# Altium PCB PCB.PcbDoc
Units mm, origin at the board's own origin, x right, y up, seen from the top; angles counter-clockwise.
Board outline 22 x 22 mm, 2 copper layers (Top Layer, Bottom Layer); 10 components, 6 nets, 24 pads, 59 vias.
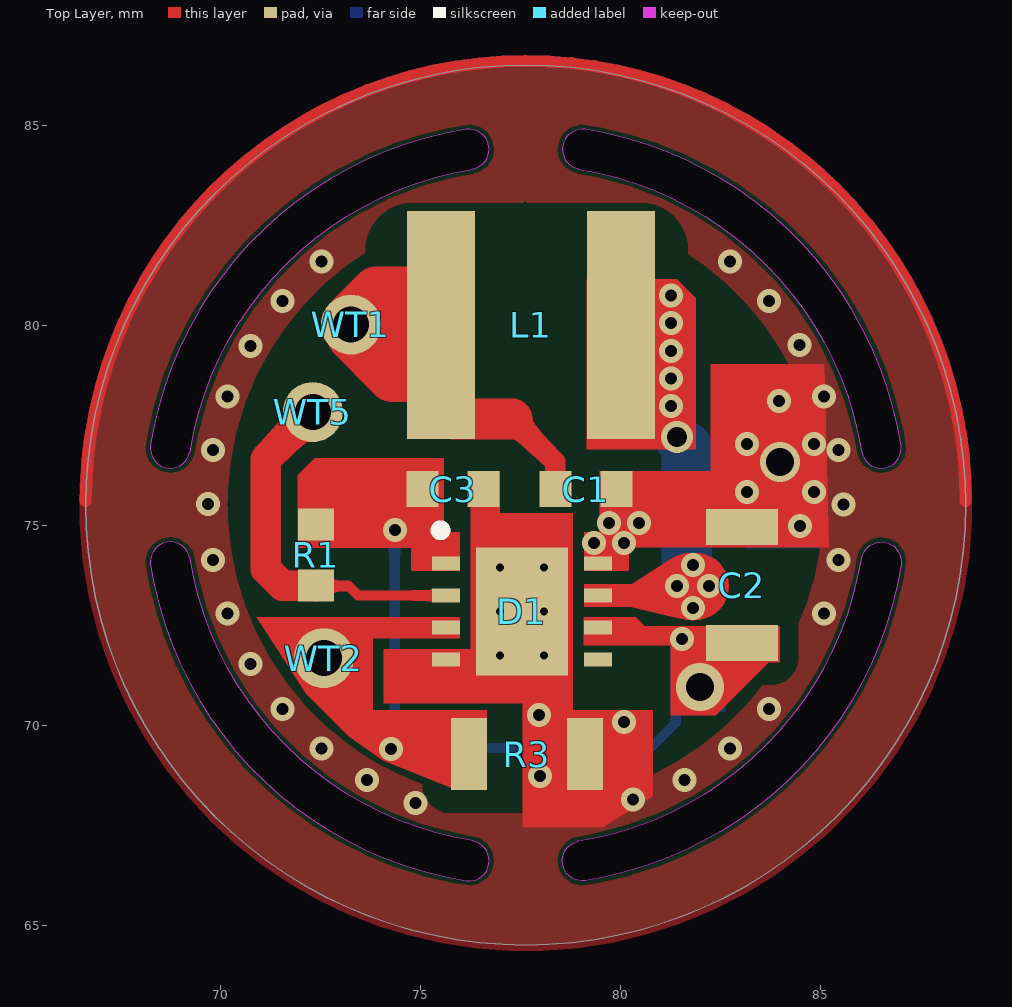
[diagram p0: Top Layer view]
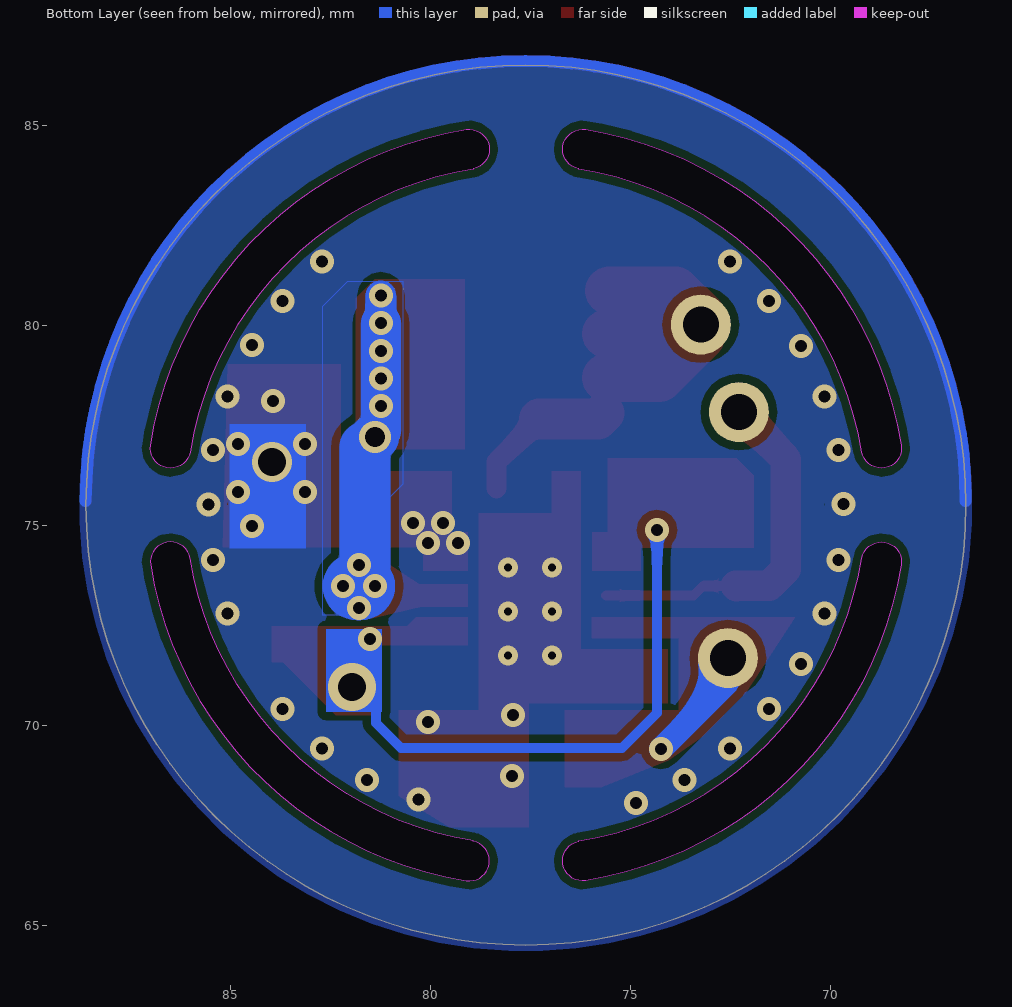
[diagram p1: Bottom Layer view, seen from below]
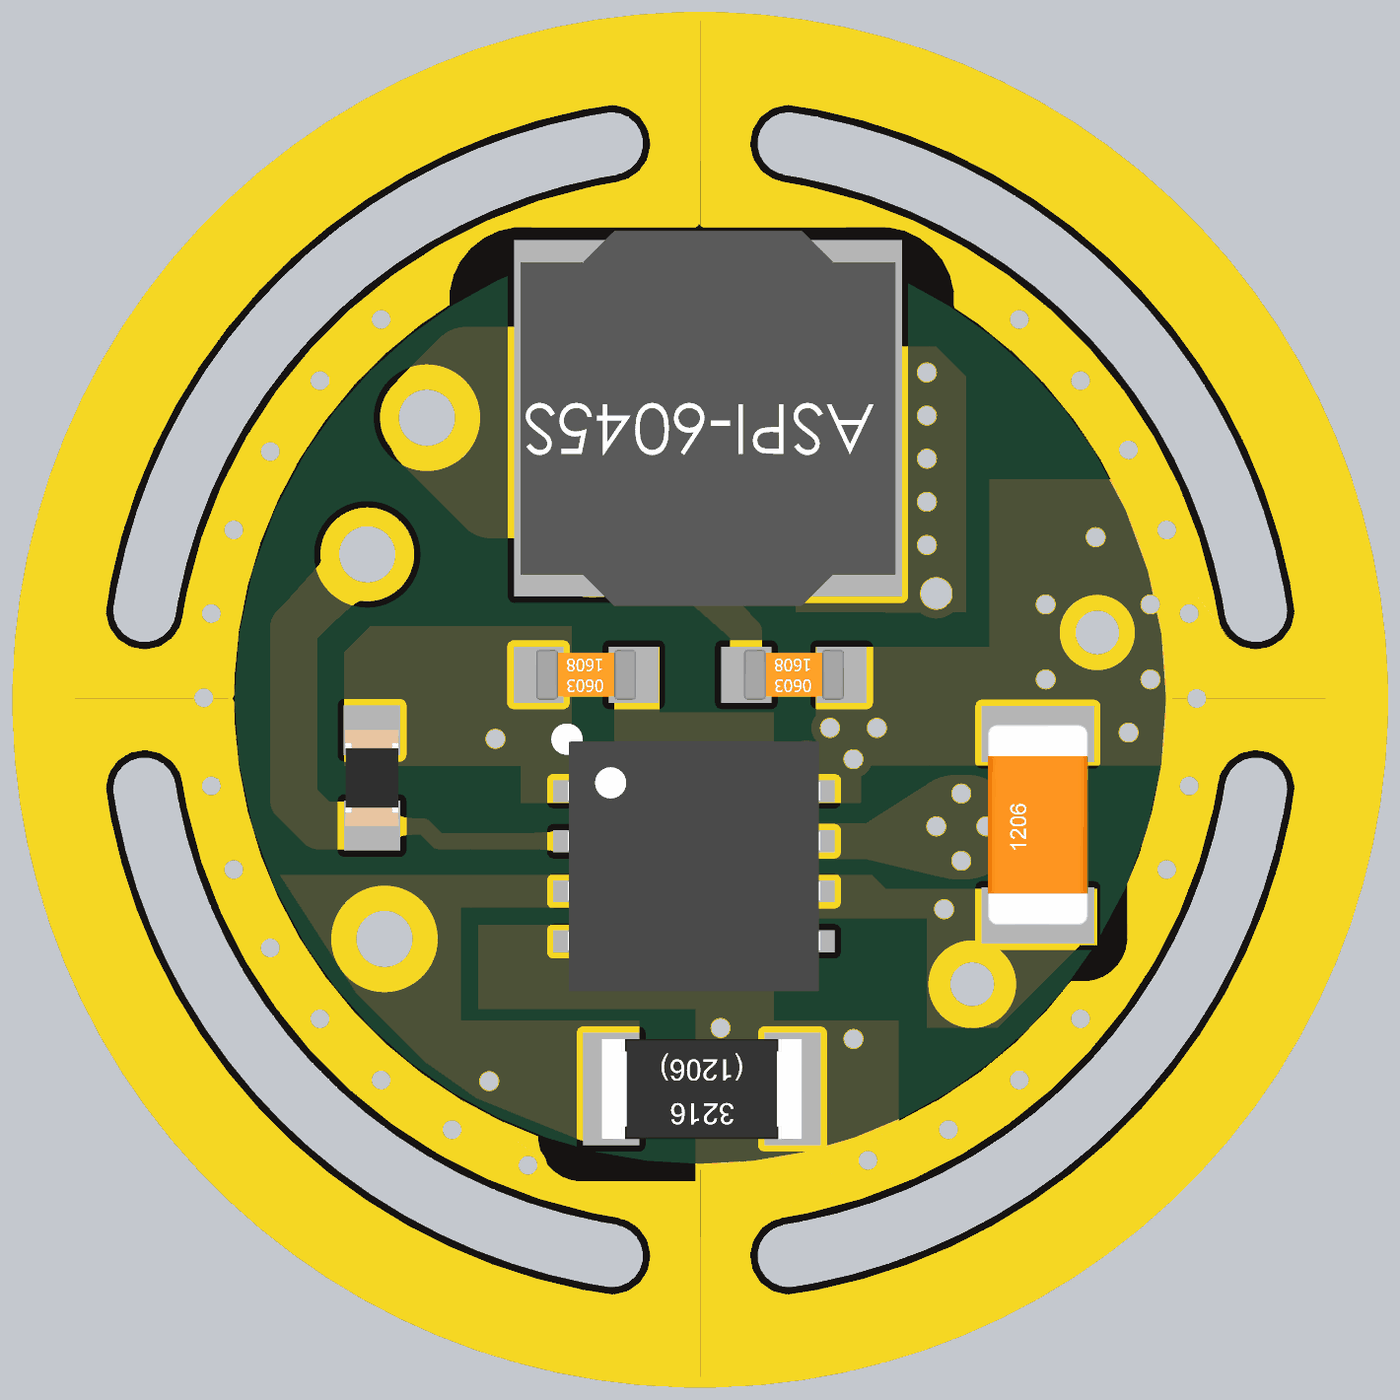
[diagram p2: 3D render of the assembled board from above, using the file's embedded part models]

## Layer stack, top to bottom
Top Solder: solder mask 0.0102, Solder Resist, Dk 3.5
Top Layer: signal copper 0.0356
Dielectric 1: dielectric 0.32, FR-4, Dk 4.8
Bottom Layer: signal copper 0.0356
Bottom Solder: solder mask 0.0102, Solder Resist, Dk 3.5

## Board outline
66.625,75.5 ccw(c77.625,75.5) 77.625,64.5 ccw(c77.625,75.5) 88.625,75.5 ccw(c77.625,75.5) 77.625,86.5 ccw(c77.625,75.5)
cut-out: 68.243,76.997 ccw(c68.737,76.923) 69.227,76.825 69.232,76.824 cw(c77.628,75.497) 76.308,83.894 76.307,83.905 ccw(c76.209,84.395) 76.135,84.889 ccw(c77.625,75.507)
cut-out: 78.942,83.894 cw(c77.623,75.497) 86.018,76.824 86.023,76.825 ccw(c86.513,76.923) 87.007,76.997 ccw(c77.625,75.507) 79.115,84.889 ccw(c79.041,84.395)
cut-out: 68.243,74.003 ccw(c77.625,75.493) 76.135,66.111 ccw(c76.209,66.605) 76.307,67.095 76.308,67.106 cw(c77.628,75.503) 69.232,74.176 69.227,74.175 ccw(c68.737,74.077)
cut-out: 79.115,66.111 cw(c79.041,66.605) 78.943,67.095 78.942,67.106 ccw(c77.623,75.503) 86.018,74.176 86.023,74.175 cw(c86.513,74.077) 87.007,74.003 cw(c77.625,75.493)

## Design rules (kind name [scope] priority, off if disabled: settings)
Clearance [InNamedPolygon('BotLayer-GND')] p1: gap=0.2
Clearance Clearance_2 [InNamedPolygon('TopLayer-GND')] p2: gap=0.1
Clearance Clearance_1 [All] p3: gap=0.01
ComponentClearance [All] p1: gap=-20 collisioncheckmode=3 verticalgap=-20 showdistances=FALSE
PolygonConnect [All] p1: connectstyle=Direct reliefconductorwidth=0.254 reliefentries=4 polygonreliefangle="90 Angle" airgapwidth=0.254
RoutingVias [All] p1: holewidth=0.711 width=1.27 viastyle="Through Hole" minholewidth=0.1 minwidth=0.1 maxholewidth=0.711 maxwidth=1.27
SolderMaskExpansion [All] p1: expansion=0.102
Width [All] p1: maxlimit=1.27 minlimit=0.01 preferedwidth=0.254
29 further rules are at their usual default settings.

## Components (designator, comment, footprint, x,y, rotation, side; value= is the part's Value field where it differs from the comment)
C1 "2u2" "Cap 0603" 79.125,75.9 r180 top
C2 "22u" "Cap 1206" 83.025,73.5 r90 top
C3 "1u0" "Cap 0603" 75.8,75.9 r180 top
D1 "LED2001" "VQFPN-8 4x4" 77.525,72.838 r270 top
L1 "51" ASPI-6045S-5R1N-T 77.75,80 r180 top
R1 "103" "R0603 5%" 72.375,74.25 r90 top
R3 "X" "Resistor 1206" 77.65,69.275 r180 top
WT1 "*" WT 73.254,80.01 r135 top
WT2 "*" WT 72.575,71.675 r90 top
WT5 "*" WT 72.3,77.825 r90 top

## Footprints (in the part's own frame and the unit in brackets; to place one, negate y for a bottom-side part, rotate by r counter-clockwise, add the part's x,y. Pads: shape width x height; smd on the part's side, far side on the other; paste and mask are expansions set on the pad)
ASPI-6045S-5R1N-T [mm]
  rect 1.7x5.7 smd: 1(-2.25,0) 2(2.25,0)
  body extent -3,-3 3,3, height 4.5
"Cap 0603" [mm]
  rect 0.8x0.9 smd: 1(-0.762,0) 2(0.762,0)
  body extent -0.8,-0.4 0.8,0.4, height 0.8
"Cap 1206" [mm]
  rect 0.9x1.8 smd: 1(-1.45,0) 2(1.45,0)
  body extent -1.6,-0.8 1.6,0.8, height 1
"R0603 5%" [mm]
  rect 0.8x0.9 smd: 1(-0.762,0) 2(0.762,0)
  body extent -0.77,-0.43 0.78,0.43, height 0.43
"Resistor 1206" [mm]
  rect 0.9x1.8 smd: 1(-1.45,0) 2(1.45,0)
  body extent -1.6,-0.8 1.6,0.8, height 0.55
"VQFPN-8 4x4" [mm]
  rect 0.35x0.7 smd: 1(-1.2,-1.9) 2(-0.4,-1.9) 3(0.4,-1.9) 4(1.2,-1.9) 5(1.2,1.9) 6(0.4,1.9) 7(-0.4,1.9) 8(-1.2,1.9)
  rect 3.2x2.3 smd: 9(0,0)
  silkscreen extent -2.16,-2.16 -1.91,-1.91, body extent -2,-2.02 2,2.02, height 0.9
WT [mm]
  round 1.5 hole 0.9: 1(0,0)

## Part data
C1: library part CMP-00038-2, "C 2.2uF  x 25V"
C2: library part CMP-00564-1, "C 22uF x 25V"
C3: library part CMP-00074-2, "C 1uF  x 25V"
D1: library part CMP-00546-6
L1: library part CMP-00554-1, "ASPI-6045S-5R1N-T, 5.1uH x 3.3A"
R1: library part CMP-00052-2, "R 10K"
R3: library part CMP-00516-2, "R X"
WT1 WT2 WT5: library part CMP-00159-1, "WT"

## Via types
v1: diameter 0.6, hole 0.3, Top Layer to Bottom Layer, tented both sides, 49 vias
v2: diameter 0.5, hole 0.2, Top Layer to Bottom Layer, 6 vias
v3: diameter 0.8/0.8 (per signal layer), hole 0.5, Top Layer to Bottom Layer, 1 vias
v4: diameter 1.2/1.2 (per signal layer), hole 0.7, Top Layer to Bottom Layer, 1 vias
v5: diameter 0.6/0.6 (per signal layer), hole 0.3, Top Layer to Bottom Layer, tented both sides, 1 vias
v6: diameter 1, hole 0.7, Top Layer to Bottom Layer, 1 vias

## Nets (pads, with @x,y where several pads share a name; then routed paths per layer and width w, separated by ;. In a path a pad name is that pad's centre, name@x,y a point inside that pad or via, vN(x,y) a via of type N, cw(c..) or ccw(c..) an arc to the next point about the centre after c; other vN are vias at no path point)
22V: C2.1 C3.2 D1.1 D1.6 R1.2 | length 12.8
  Bottom Layer w0.254: v1(74.35,74.875) 74.35,70.3 75.225,69.425 80.75,69.425 81.375,70.05 81.375,70.6 ; v5(81.525,72.15) v5@81.525,72.175
  other v4: 81.975,70.95
DIM: D1.2 R1.1 WT5.1 | length 9.2
  Top Layer w0.254: R1.1@72.374,73.475 73.2,73.475 73.437,73.238 D1.2
  Top Layer w0.762: WT5.1 71.125,76.65 71.125,73.9 71.537,73.488 R1.1 ; R1.1@72.362,73.475 R1.1
LED1: C1.2 L1.2 WT1.1 | length 11.7
  Top Layer w0.508: 77.29,77.65 78.359,76.581 C1.2@78.359,75.921
  Top Layer w1.016: L1.2@75.675,77.8 75.825,77.65 77.29,77.65
  Top Layer w1.208: WT1.1@73.629,79.785 L1.2@75.62,79.785 ; L1.2@75.545,80.86 73.885,80.86 73.254,80.229 WT1.1 73.254,79.721 74.29,78.685 L1.2@75.625,78.685
NetD1_3: D1.3 R3.2 WT2.1 | length 3
  Bottom Layer w0.584: WT2.1 72.575,71.075 v1(74.25,69.4)
NetD1_7: D1.7 L1.1 | length 12.8
  Top Layer w0.33: D1.7 81.163,73.238 v1(81.4,73.475)
  Top Layer w0.508: L1.1@79.999,79.756 79.999,77.526 80.375,77.15 81.35,77.15 v3(81.4,77.2)
  Bottom Layer w0.762: v3@81.25,77.35 v3(81.4,77.2) ; v1(81.25,80.045) v1(81.25,80.735)
  Bottom Layer w1: v3@81.25,77.35 v1(81.25,77.975) v1(81.25,78.665) v1(81.25,79.355) v1(81.25,80.045)
  Bottom Layer w1.2: v3(81.4,77.2) v3@81.65,76.95
  Bottom Layer w1.27: v1@81.65,74 v3@81.65,76.95
  other v1: 81.8,72.925 82.2,73.475 81.8,74
P_GND: C1.1 C2.2 C3.1 D1.4 D1.8 D1.9 R3.1 | length 69.1
  Top Layer w0.3: 66.624,75.604 cw(c77.624,75.604) 77.038,86.588 cw(c77.624,75.604) 88.624,75.604
  Bottom Layer w0.3: 66.63,75.604 cw(c77.63,75.604) 88.63,75.604
  other v1: 74.87,68.055 80.306,68.133 73.655,68.624 81.595,68.624 77.975,68.725 72.521,69.418 82.729,69.418 80.075,70.075 77.95,70.25 71.543,70.396 83.707,70.396 70.749,71.53 70.164,72.784 85.086,72.784 69.806,74.121 85.444,74.121 79.325,74.55 80.075,74.55 84.475,74.975 79.7,75.05 80.45,75.05 85.565,75.519 69.685,75.531 83.15,75.825 84.825,75.825 69.806,76.879 85.444,76.879 83.15,77.025 84.825,77.025 83.95,78.1 70.164,78.216 85.086,78.216 70.749,79.47 84.474,79.497 71.543,80.604 83.707,80.604 72.521,81.582 82.729,81.582
  other v2: 76.975,71.738 78.075,71.738 76.975,72.838 78.075,72.838 76.975,73.938 78.075,73.938
  other v6: 83.975,76.575
pads on no net: D1.5

## Polygon pours and split planes (outlines as drawn)
P_GND on Bottom Layer "BotLayer-GND" (solid, remove dead copper, pour order 79): 77.557,86.396 77.557,83.089 ccw(c77.625,75.539) 70.075,75.53 ccw(c70.125,75.53) 70.175,75.53 ccw(c70.125,75.53) 70.175,75.53 cw(c77.625,75.539) 77.588,82.988 ccw(c77.621,83.043) 77.654,82.988 cw(c77.625,75.539) 85.075,75.539 ccw(c85.125,75.539) 85.075,75.533 ccw(c85.125,75.528) 85.075,75.528 cw(c77.625,75.539) 85.075,75.526 ccw(c85.125,75.526) 85.125,75.476 ccw(c85.125,75.526) 85.125,75.476 86.256,75.478 86.9,75.479 88.488,75.481 ccw(c88.63,75.532) 88.78,75.532 ccw(c77.63,75.532) 77.621,86.682 ccw(c77.621,86.532)
P_GND on Bottom Layer "BotLayer-GND" (solid, remove dead copper, pour order 77): 70.175,75.53 cw(c70.125,75.53) 70.175,75.526 cw(c70.125,75.521) 70.175,75.521 ccw(c77.634,75.545) 70.175,75.52 ccw(c77.608,75.519) 70.175,75.519 ccw(c70.125,75.519) 70.175,75.52 70.175,75.519 cw(c70.125,75.519) 70.125,75.468 cw(c70.125,75.519) 70.125,75.468 ccw(c70.125,75.519) 70.125,75.468 68.994,75.47 68.35,75.471 66.772,75.474 cw(c66.63,75.525) 66.48,75.525 cw(c77.63,75.532) 68.943,82.522 cw(c77.63,75.532) 77.621,86.682 cw(c77.621,86.532) 77.771,86.532 cw(c77.621,86.532) 77.685,86.396 77.685,83.089 cw(c77.625,75.539) 85.175,75.539 cw(c85.125,75.539) 85.075,75.539 ccw(c77.625,75.539) 77.654,82.988 cw(c77.621,83.043) 77.588,82.988 ccw(c77.625,75.539)
P_GND on Bottom Layer "BotLayer-GND" (solid, remove dead copper, pour order 31): 70.175,75.509 ccw(c70.125,75.509) 70.175,75.513 ccw(c70.125,75.518) 70.175,75.518 cw(c77.634,75.494) 70.175,75.519 cw(c77.608,75.52) 70.175,75.52 cw(c70.125,75.52) 70.175,75.519 70.175,75.52 ccw(c70.125,75.52) 70.125,75.57 ccw(c70.125,75.52) 70.125,75.57 cw(c70.125,75.52) 70.125,75.57 68.994,75.569 68.35,75.567 66.772,75.565 ccw(c66.63,75.514) 66.48,75.514 ccw(c77.63,75.507) 68.943,68.517 ccw(c77.63,75.507) 77.621,64.357 ccw(c77.621,64.507) 77.771,64.507 ccw(c77.621,64.507) 77.685,64.643 77.685,67.95 ccw(c77.625,75.5) 85.175,75.5 ccw(c85.125,75.5) 85.075,75.5 cw(c77.625,75.5) 77.654,68.05 ccw(c77.621,67.996) 77.588,68.05 cw(c77.625,75.5)
P_GND on Bottom Layer "BotLayer-GND" (solid, remove dead copper, pour order 29): 77.557,64.643 77.557,67.95 cw(c77.625,75.5) 70.075,75.509 cw(c70.125,75.509) 70.175,75.509 cw(c70.125,75.509) 70.175,75.509 ccw(c77.625,75.5) 77.588,68.05 cw(c77.621,67.996) 77.654,68.05 ccw(c77.625,75.5) 85.075,75.5 cw(c85.125,75.5) 85.075,75.506 cw(c85.125,75.511) 85.075,75.511 ccw(c77.625,75.5) 85.075,75.513 cw(c85.125,75.513) 85.125,75.563 cw(c85.125,75.513) 85.125,75.563 86.256,75.561 86.9,75.56 88.488,75.558 cw(c88.63,75.507) 88.78,75.507 cw(c77.63,75.507) 77.621,64.357 cw(c77.621,64.507)
P_GND on Bottom Layer "BotLayer-GND" (solid, remove dead copper, pour order 81): 70.176,68.061 85.076,68.061 85.071,82.988 70.176,82.988
NetD1_7 on Bottom Layer "NetD1_7x" (solid, pour order 83): 81.7,72.725 81.725,72.75 82.7,72.75 82.7,80.475 82.175,81 82.075,81.1 80.7,81.1 80.7,76.025 81.025,75.7 81.025,73.275 81.175,73.125
NetD1_7 on Bottom Layer "Bottom Layer-NetD1_7" (solid, pour order 85): 81.7,72.725 81.725,72.75 82.7,72.75 82.7,80.475 82.175,81 82.075,81.1 80.7,81.1 80.7,76.025 81.025,75.7 81.025,73.275 81.175,73.125
P_GND on Top Layer "TopLayer-GND" (solid, remove dead copper, pour order 65): 70.17,75.508 ccw(c70.119,75.508) 70.169,75.513 ccw(c70.119,75.518) 70.17,75.518 cw(c77.628,75.493) 70.17,75.519 cw(c77.602,75.519) 70.17,75.52 cw(c70.119,75.52) 70.17,75.519 70.17,75.52 ccw(c70.119,75.52) 70.119,75.57 ccw(c70.119,75.52) 70.119,75.57 cw(c70.119,75.52) 70.119,75.57 68.988,75.568 68.344,75.567 66.766,75.565 ccw(c66.624,75.514) 66.474,75.514 ccw(c77.624,75.507) 68.937,68.517 ccw(c77.624,75.507) 77.615,64.356 ccw(c77.615,64.507) 77.765,64.507 ccw(c77.615,64.507) 77.679,64.643 77.679,67.95 ccw(c77.619,75.5) 85.17,75.5 ccw(c85.119,75.5) 85.069,75.5 cw(c77.619,75.5) 77.648,68.05 ccw(c77.615,67.996) 77.582,68.05 cw(c77.619,75.5)
P_GND on Top Layer "TopLayer-GND" (solid, remove dead copper, pour order 67): 77.551,64.643 77.551,67.95 cw(c77.619,75.5) 70.069,75.508 cw(c70.119,75.508) 70.17,75.508 cw(c70.119,75.508) 70.17,75.508 ccw(c77.619,75.5) 77.582,68.05 cw(c77.615,67.996) 77.648,68.05 ccw(c77.619,75.5) 85.069,75.5 cw(c85.119,75.5) 85.069,75.505 cw(c85.119,75.511) 85.069,75.511 ccw(c77.619,75.5) 85.069,75.512 cw(c85.119,75.513) 85.119,75.563 cw(c85.119,75.513) 85.119,75.563 86.251,75.561 86.894,75.56 88.483,75.557 cw(c88.624,75.507) 88.775,75.507 cw(c77.624,75.507) 77.615,64.356 cw(c77.615,64.507)
P_GND on Top Layer "TopLayer-GND" (solid, remove dead copper, pour order 73): 77.551,86.396 77.551,83.089 ccw(c77.619,75.539) 70.069,75.53 ccw(c70.119,75.53) 70.17,75.531 ccw(c70.119,75.531) 70.17,75.531 cw(c77.619,75.539) 77.582,82.989 ccw(c77.615,83.043) 77.648,82.989 cw(c77.619,75.539) 85.069,75.539 ccw(c85.119,75.539) 85.069,75.534 ccw(c85.119,75.528) 85.069,75.528 cw(c77.619,75.539) 85.069,75.526 ccw(c85.119,75.526) 85.119,75.476 ccw(c85.119,75.526) 85.119,75.476 86.251,75.478 86.894,75.479 88.483,75.482 ccw(c88.624,75.532) 88.775,75.532 ccw(c77.624,75.532) 77.615,86.683 ccw(c77.615,86.532)
P_GND on Top Layer "TopLayer-GND" (solid, remove dead copper, pour order 75): 70.17,75.531 cw(c70.119,75.531) 70.169,75.526 cw(c70.119,75.521) 70.17,75.521 ccw(c77.628,75.545) 70.17,75.52 ccw(c77.602,75.52) 70.17,75.519 ccw(c70.119,75.519) 70.17,75.52 70.17,75.519 cw(c70.119,75.519) 70.119,75.469 cw(c70.119,75.519) 70.119,75.469 ccw(c70.119,75.519) 70.119,75.469 68.988,75.471 68.344,75.472 66.766,75.474 cw(c66.624,75.525) 66.474,75.525 cw(c77.624,75.532) 68.937,82.522 cw(c77.624,75.532) 77.615,86.683 cw(c77.615,86.532) 77.765,86.532 cw(c77.615,86.532) 77.679,86.396 77.679,83.089 cw(c77.619,75.539) 85.17,75.539 cw(c85.119,75.539) 85.069,75.539 ccw(c77.619,75.539) 77.648,82.989 cw(c77.615,83.043) 77.582,82.989 ccw(c77.619,75.539)

## Other copper
Top Layer:
  rectangle net NetD1_7: 79.075,72.95 80.275,73.525
  rectangle net 22V: 74.75,73.85 75.975,74.825
  rectangle net P_GND: 79.075,73.85 80.2,74.825
  region net NetD1_7: 80.275,72.95 81.502,72.658 81.199,74.116 80.275,73.525
  region net P_GND: 76.25,71.9 74.075,71.9 74.075,70.55 77.55,70.55 77.55,67.45 79.545,67.45 80.8,68.218 80.8,70.375 78.8,70.375 78.8,71.5 78.8,75.3 76.975,75.3 76.975,76.35 76.25,76.35
  region net NetD1_3: 75.975,72.7 70.898,72.7 72.137,70.787 73.198,69.726 74.05,69.125 75.725,68.45 76.65,68.45 76.65,70.375 73.8,70.375 73.8,72.175 75.975,72.175
  region net 22V: 75.575,76.675 75.575,74.438 71.925,74.438 71.925,76.25 72.35,76.675 73.875,76.675
  region net NetD1_7: 79.15,76.9 81.875,76.9 81.875,80.675 81.4,81.15 79.15,81.15
  region net P_GND: 79.475,74.45 79.475,76.35 82.25,76.35 82.25,79.025 85.081,79.025 85.2,74.45
  region net 22V: 79.075,72.7 79.075,72 81.25,72 81.25,70.25 82.375,70.25 83.7,71.575 83.975,71.575 83.975,72.475 80.6,72.475 80.375,72.7
  region net NetD1_7: 80.9,73.475 cw(c81.725,73.475) 81.725,74.3 81.875,74.3 cw(c81.875,73.475) 82.7,73.475 cw(c81.85,73.475) 81.85,72.625 81.75,72.625 cw(c81.75,73.475)
  pour cut-out: 77.688,67.799 75.737,67.799 cw(c75.737,68.499) 75.037,68.499 75.037,69.657
  pour cut-out: 84.454,72.759 84.454,71.7 cw(c83.754,71.7) 83.754,71 83.221,71
  pour cut-out: 76.841,83.056 80.509,83.057 cw(c80.509,81.882) 81.659,81.643
  pour cut-out: 78.457,83.056 74.789,83.057 ccw(c74.789,81.882) 73.639,81.643
Bottom Layer:
  rectangle net 22V: 81.225,70.325 82.625,72.4
  region net P_GND: 83.125,77.525 83.125,74.425 84.163,74.425 85.025,74.425 85.025,77.525 84.8,77.525
  region net NetD1_7: 82.7,73.475 ccw(c81.875,73.475) 81.875,74.3 81.725,74.3 ccw(c81.725,73.475) 80.9,73.475 ccw(c81.75,73.475) 81.75,72.625 81.85,72.625 ccw(c81.85,73.475)

## Silkscreen, mask and mechanical layers (free items; w line width, h text height)
Top Solder:
  region: 88.62,75.514 ccw(c77.62,75.507) 77.625,86.507 77.631,83 cw(c77.625,75.5) 83.98,79.483 cw(c77.625,75.5) 85.125,75.52
  region: 88.62,75.514 cw(c77.62,75.522) 77.625,64.522 77.631,68.029 ccw(c77.625,75.529) 83.98,71.545 ccw(c77.625,75.529) 85.125,75.509
  region: 66.63,75.514 ccw(c77.63,75.522) 77.625,64.522 77.619,68.029 cw(c77.625,75.529) 71.27,71.545 cw(c77.625,75.529) 70.125,75.509
  region: 66.63,75.514 cw(c77.63,75.507) 77.625,86.507 77.619,83 ccw(c77.625,75.5) 71.27,79.483 ccw(c77.625,75.5) 70.125,75.52
  lines w0.1: 70.125,75.509 ccw(c77.625,75.529) 71.27,71.545 ccw(c77.625,75.529) 77.619,68.029 ; 70.125,75.52 cw(c77.625,75.5) 71.27,79.483 cw(c77.625,75.5) 77.619,83 ; 77.631,68.029 ccw(c77.625,75.529) 83.98,71.545 ccw(c77.625,75.529) 85.125,75.509 ; 77.631,83 cw(c77.625,75.5) 83.98,79.483 cw(c77.625,75.5) 85.125,75.52
  lines w0.3: 66.63,75.514 ccw(c77.63,75.522) 77.625,64.522 ccw(c77.62,75.522) 88.62,75.514 ccw(c77.62,75.507) 77.625,86.507 ccw(c77.63,75.507) 66.63,75.514
Bottom Solder:
  region: 66.625,75.525 cw(c77.625,75.518) 77.62,86.518 77.614,83.011 ccw(c77.62,75.511) 71.265,79.494 ccw(c77.62,75.511) 70.12,75.531
  region: 66.625,75.525 ccw(c77.625,75.532) 77.62,64.532 77.614,68.039 cw(c77.62,75.539) 71.265,71.556 cw(c77.62,75.539) 70.12,75.519
  region: 88.615,75.525 cw(c77.615,75.532) 77.62,64.532 77.626,68.039 ccw(c77.62,75.539) 83.975,71.556 ccw(c77.62,75.539) 85.12,75.519
  region: 88.615,75.525 ccw(c77.615,75.518) 77.62,86.518 77.626,83.011 cw(c77.62,75.511) 83.975,79.494 cw(c77.62,75.511) 85.12,75.531
  lines w0.05: 66.631,75.519 70.12,75.519 ; 66.631,75.531 70.12,75.531 ; 85.12,75.519 88.609,75.519 ; 85.12,75.531 88.609,75.531
  lines w0.1: 70.12,75.519 ccw(c77.62,75.539) 71.265,71.556 ccw(c77.62,75.539) 77.614,68.039 ; 70.12,75.531 cw(c77.62,75.511) 71.265,79.494 cw(c77.62,75.511) 77.614,83.011 ; 85.12,75.519 cw(c77.62,75.539) 83.975,71.556 cw(c77.62,75.539) 77.626,68.039 ; 85.12,75.531 ccw(c77.62,75.511) 83.975,79.494 ccw(c77.62,75.511) 77.626,83.011 ; 77.614,68.039 77.62,64.532 ; 77.614,68.039 77.614,68.039 ; 77.614,83.011 77.614,83.011 ; 77.614,83.011 77.62,86.518 ; 77.62,64.532 77.62,64.527 77.62,64.532 ; 77.62,64.532 77.626,68.039 ; 77.62,86.518 77.62,86.523 77.62,86.518 ; 77.62,86.518 77.626,83.011 ; 77.626,68.039 77.626,68.039 ; 77.626,83.011 77.626,83.011
  lines w0.3: 66.625,75.525 cw(c77.625,75.518) 77.62,86.518 cw(c77.615,75.518) 88.615,75.525 cw(c77.615,75.532) 77.62,64.532 cw(c77.625,75.532) 66.625,75.525
  text "L+" at 76.2,79.575 h1.78
  text "D" at 74.35,77.25 h1.78
  text "−" at 83.425,77.15 h2.54
  text "FOR LED.COM.UA / FLD   322" at 82.225,74.475 h1.27
  text "+" at 84.05,72.2 h2.54
  text "L−" at 76.425,70.625 h1.78
Board:
  circle w0.1: c77.625,75.6 r11
  pour cut-out: 68.243,74.003 ccw(c77.625,75.493) 76.135,66.111 ccw(c76.209,66.605) 76.307,67.095 76.308,67.106 cw(c77.628,75.503) 69.232,74.176 69.227,74.175 ccw(c68.737,74.077)
  lines w0.1: 69.227,74.175 ccw(c68.737,74.077) 68.243,74.003 ccw(c77.625,75.493) 76.135,66.111 ccw(c76.209,66.605) 76.307,67.095 ; 69.227,76.825 cw(c68.737,76.923) 68.243,76.997 cw(c77.625,75.507) 76.135,84.889 cw(c76.209,84.395) 76.307,83.905 ; 69.232,74.176 ccw(c77.628,75.503) 76.308,67.106 ; 69.232,76.824 cw(c77.628,75.497) 76.308,83.894 ; 78.943,67.095 ccw(c79.041,66.605) 79.115,66.111 ccw(c77.625,75.493) 87.007,74.003 ccw(c86.513,74.077) 86.023,74.175 ; 78.942,67.106 ccw(c77.623,75.503) 86.018,74.176 ; 78.942,83.894 cw(c77.623,75.497) 86.018,76.824 ; 78.943,83.905 cw(c79.041,84.395) 79.115,84.889 cw(c77.625,75.507) 87.007,76.997 cw(c86.513,76.923) 86.023,76.825